# Altium PCB LED.PcbDoc
Units mm, origin at the board's own origin, x right, y up, seen from the top; angles counter-clockwise.
Board outline 20 x 20 mm, 2 copper layers (Top Layer, Bottom Layer), stack 1.671 mm thick; 3 components, 3 nets, 6 pads, 1 vias.
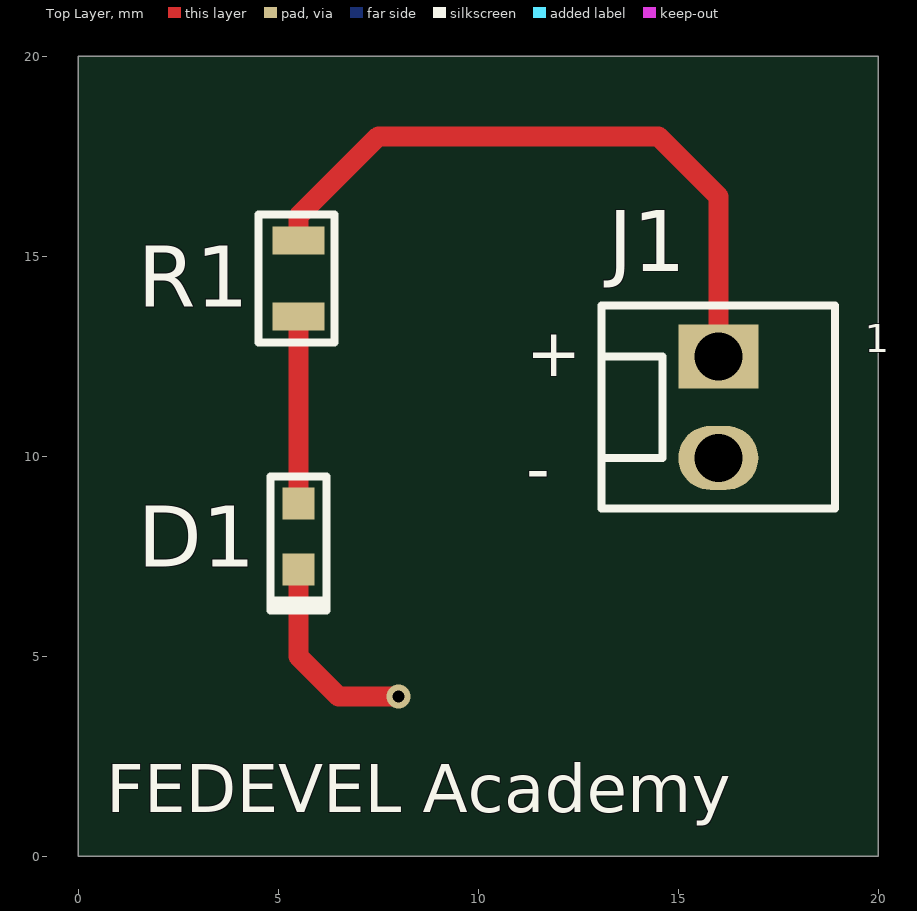
[diagram p0: Top Layer view]
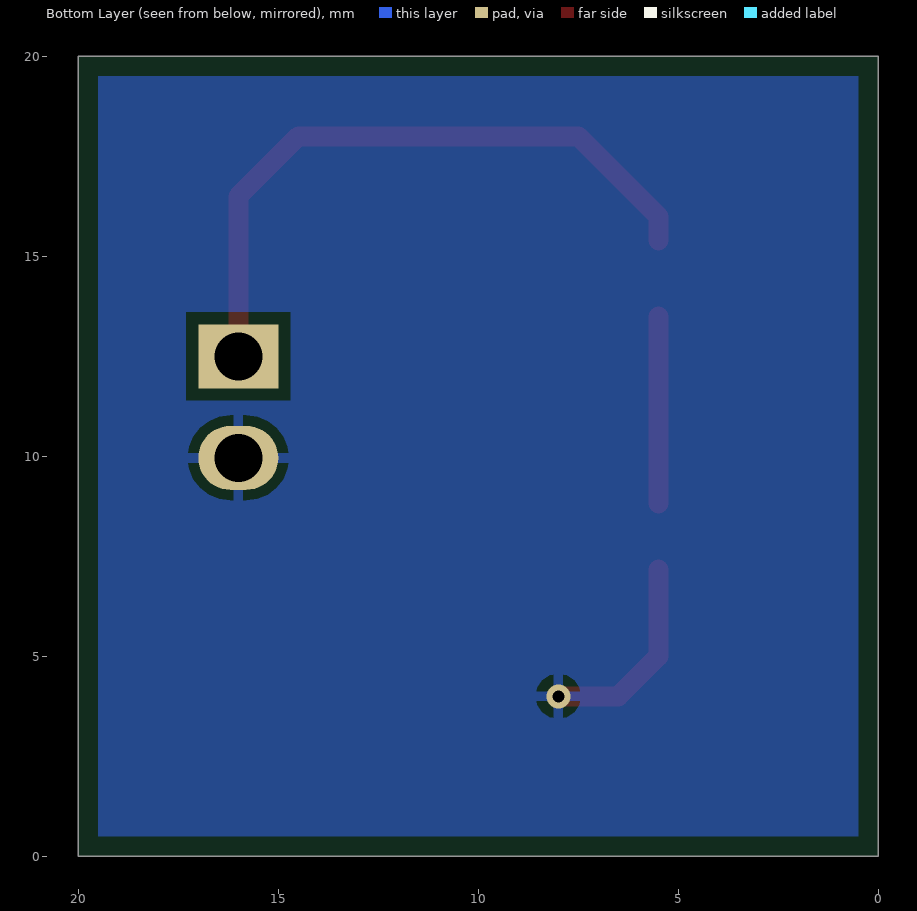
[diagram p1: Bottom Layer view, seen from below]
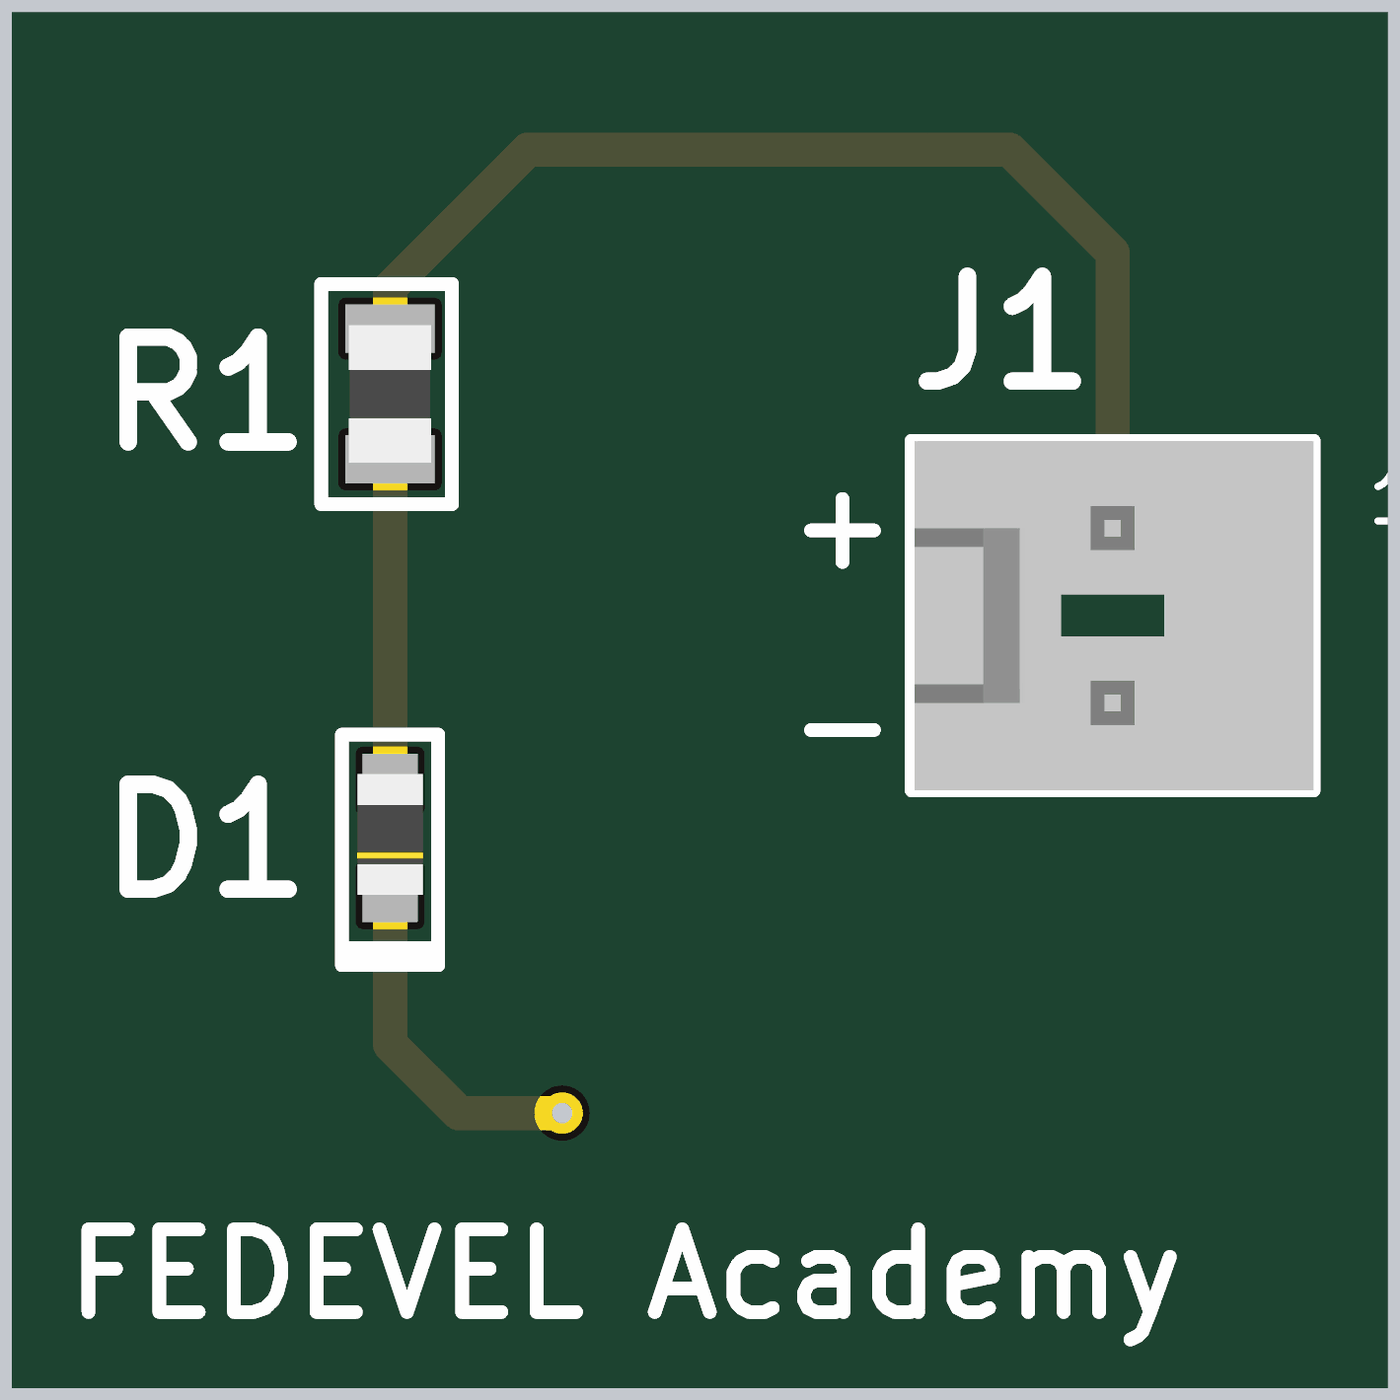
[diagram p2: 3D render of the assembled board from above, using the file's embedded part models]

## Layer stack, top to bottom
Top Solder: solder mask 0.0102, Solder Resist, Dk 3.5
Top Layer: signal copper 0.0356
Dielectric 1: dielectric 1.6, FR-4, Dk 4.8
Bottom Layer: signal copper 0.0356
Bottom Solder: solder mask 0.0102, Solder Resist, Dk 3.5

## Board outline
0,20 20,20 20,0 0,0

## Design rules (kind name [scope] priority, off if disabled: settings)
Clearance [All] p1: gap=0.3 ignorepadtopadclearanceinfootprint=FALSE
PolygonConnect [All] p1: connectstyle=Relief reliefconductorwidth=0.254 reliefentries=4 polygonreliefangle="90 Angle" airgapwidth=0.254
RoutingVias [All] p1: holewidth=0.3 width=0.6 viastyle="Through Hole" minholewidth=0.3 minwidth=0.6 maxholewidth=0.3 maxwidth=0.6
SilkToSolderMaskClearance [IsPad] p1: minsilkscreentomaskgap=0.1 clearancetoexposedcopper=TRUE
SolderMaskExpansion [All] p1: expansion=0.102 istentingtop=FALSE
Width [All] p1: maxlimit=1 minlimit=0.3 preferedwidth=0.5
29 further rules are at their usual default settings.

## Components (designator, comment, footprint, x,y, rotation, side; value= is the part's Value field where it differs from the comment)
D1 "AMBER" LED0603AMBER 5.5,8 r90 top
J1 "1x2 Header" HEADER1x2 16,12.5 r0 top
R1 "360R" R0805 5.5,14.45 r90 top

## Footprints (in the part's own frame and the unit in brackets; to place one, negate y for a bottom-side part, rotate by r counter-clockwise, add the part's x,y. Pads: shape width x height; smd on the part's side, far side on the other; paste and mask are expansions set on the pad)
HEADER1x2 [mm]
  rect 2x1.6 / inner rect 2x1.2 / far side rect 2x1.6 hole 1.2: 1(0,0)
  oval 2x1.6 / inner oval 2x1.2 / far side oval 2x1.6 hole 1.2: 2(0,-2.54)
  silkscreen extent -2.92,-3.81 2.92,1.27, body extent -2.88,-3.81 2.92,1.27, height 11.71
LED0603AMBER [mm]
  rect 0.8x0.8 smd: 1(-0.825,0) 2(0.825,0)
  silkscreen extent -1.85,-0.7 1.5,0.7, body extent -0.82,-0.48 0.92,0.48, height 0.42
R0805 [mm]
  rect 0.7x1.3 smd: 1(-0.95,0) 2(0.95,0)
  silkscreen extent -1.6,-0.9 1.6,1, body extent -1,-0.6 1,0.6, height 0.71

## Part data
D1: library part LNJ437W84RA, "PANASONIC - LNJ437W84RA - LED, AMBER, 0.8MM X 1.1MM, 25MCD, 590NM", Case Code (Imperial)=0603, Case Code (Metric)=1608, Color=Orange, Forward Current=5mA, Forward Voltage=1.95V, Manufacturer="Panasonic SSG", Max Operating Temperature=85°C, Max Power Dissipation=55mW, Min Operating Temperature=-30°C, Package Quantity=5000, Reverse Voltage=4V, Supplier Part Number 1=LNJ437W84RACT-ND, Case/Package=0603, Category=Optoeletronics, ComponentLink1Description=https://datasheet.ciiva.com/4689/lnj437w84ra-aek-226228-4689972.pdf?src-supplier=Mouser, ComponentLink1URL=https://datasheet.ciiva.com/4689/lnj437w84ra-aek-226228-4689972.pdf?src-supplier=Mouser, ComponentLink2Description=https://datasheet.ciiva.com/8028/lnj437w84ra-aek-8028645.pdf?src-supplier=Element14, ComponentLink2URL=https://datasheet.ciiva.com/8028/lnj437w84ra-aek-8028645.pdf?src-supplier=Element14, ComponentLink3Description=https://datasheet.ciiva.com/11775/0900766b80f0a8c0-11775375.pdf?src-supplier=RSComponents, ComponentLink3URL=https://datasheet.ciiva.com/11775/0900766b80f0a8c0-11775375.pdf?src-supplier=RSComponents, Dominant Wavelength=590nm, Height=0.2mm, Illumination Color=Orange, Lead Free="Lead Free", Length=1.6mm, Lens Style=Rectangular, Luminous Intensity=25mcd, Manufacturer Part Number=LNJ437W84RA, Mount="Surface Mount", Number of LEDs=1, Number of Pins=2, Packaging="Tape and Reel", Pricing 1="1=0,31000, 10=0,20200, 100=0,14490, 500=0,12154, 1000=0,11417 (USD)", REACH SVHC="No SVHC", RoHS=Yes, Stock 1=118867, Supplier 1=Digi-Key, Test Current=5mA, Wavelength=590nm, Width=0.8mm
J1: library part 22-29-2021, "Conn Wire to Board HDR 2 POS 2.54mm Solder ST Thru-Hole Bag", Color=White, Flammability Rating="UL94 V-0", Insulation Color=Natural, Manufacturer=Molex, Max Operating Temperature=80°C, Supplier Part Number 1=WM2744-ND, Voltage Rating (DC)=250V, Category=Connectors, ComponentLink1Description=https://datasheet.ciiva.com/70131/022292021-sd-70131706.pdf?src-supplier=Digi-Key, ComponentLink1URL=https://datasheet.ciiva.com/70131/022292021-sd-70131706.pdf?src-supplier=Digi-Key, Connector Type="Header,Male Pin", Contact Material=Brass, Contact Mating Length=0.295inch, Contact Plating=Gold, Contact Post Length=0.14inch, Contact Shape=Square, Fastening Type=Friction, Gender=Male, Glow Wire Compliant=Non-compliant, Halogen Free="Low Halogen", Insulation Height=0.461inch, Insulation Material=Nylon, Lead Free="Lead Free", Manufacturer Part Number=22-29-2021, Mount="Through Hole", Number of Positions=2, Number of Rows=1, Packaging=Bag, Pricing 1="1=0,48000, 10=0,45200, 100=0,31630, 500=0,27112, 1000=0,22593, 5000=0,19365, 10000=0,18074 (USD)", RoHS=Yes, Stock 1=6750, Supplier 1=Digi-Key, Termination=Solder
R1: library part CRCW080536R0FKEA, "RES, THICK FILM, 36R, 1%, 0.125W, 0805; Product Range:AEC-Q200 CRCW Series; Resistance:36ohm; Power Rating:125mW; Resistance Tolerance: 1%; Voltage Rating:150V; Resistor Case Style:0805 [2012 Metric]; Packaging:Cut Tape ;RoHS Compliant: Yes", Case Code (Imperial)=0805, Case Code (Metric)=2012, Manufacturer=Vishay, Max Operating Temperature=155°C, Max Power Dissipation=125mW, Min Operating Temperature=-55°C, Package Quantity=5000, Resistance=36R, Supplier Part Number 1=541-36.0CCT-ND, Temperature Coefficient=100ppm/°C, Tolerance=1%, Voltage Rating=150V, Case/Package=0805, Category=Resistors, ComponentLink1Description=https://datasheet.ciiva.com/5936/1697337-5936166.pdf?src-supplier=Farnell, ComponentLink1URL=https://datasheet.ciiva.com/5936/1697337-5936166.pdf?src-supplier=Farnell, ComponentLink2Description=https://datasheet.ciiva.com/2467/dcrcwe3-2467497.pdf?src-supplier=Digi-Key, ComponentLink2URL=https://datasheet.ciiva.com/2467/dcrcwe3-2467497.pdf?src-supplier=Digi-Key, ComponentLink3Description=https://datasheet.ciiva.com/22674/1912744-22674873.pdf?src-supplier=Element14, ComponentLink3URL=https://datasheet.ciiva.com/22674/1912744-22674873.pdf?src-supplier=Element14, ComponentLink4Description=https://datasheet.ciiva.com/2467/dcrcwe3-2467498.pdf?src-supplier=Digi-Key, ComponentLink4URL=https://datasheet.ciiva.com/2467/dcrcwe3-2467498.pdf?src-supplier=Digi-Key, ComponentLink5Description=https://datasheet.ciiva.com/22705/1697337-22705578.pdf?src-supplier=Element14, ComponentLink5URL=https://datasheet.ciiva.com/22705/1697337-22705578.pdf?src-supplier=Element14, ComponentLink6Description=https://datasheet.ciiva.com/2467/dcrcwe3-2467499.pdf?src-supplier=Digi-Key, ComponentLink6URL=https://datasheet.ciiva.com/2467/dcrcwe3-2467499.pdf?src-supplier=Digi-Key, ComponentLink7Description=https://datasheet.ciiva.com/9013/dcrcwe3-9013853.pdf?src-supplier=Avnet, ComponentLink7URL=https://datasheet.ciiva.com/9013/dcrcwe3-9013853.pdf?src-supplier=Avnet, ComponentLink8Description=https://datasheet.ciiva.com/5550/dcrcwe3-109170-5550495.pdf?src-supplier=Mouser, ComponentLink8URL=https://datasheet.ciiva.com/5550/dcrcwe3-109170-5550495.pdf?src-supplier=Mouser, ComponentLink9Description=https://datasheet.ciiva.com/26316/fld-crcw-e3-data-en-26316527.pdf?src-supplier=Distrelec, ComponentLink9URL=https://datasheet.ciiva.com/26316/fld-crcw-e3-data-en-26316527.pdf?src-supplier=Distrelec, Composition="Thick Film", Contact Plating=Tin, Depth=1.25mm, Features="Automotive AEC-Q200", Height=0.02inch, Lead Free="Lead Free", Length=2mm, Manufacturer Part Number=CRCW080536R0FKEA, Military Standard=Not, Number of Pins=2, Number of Terminations=2, Packaging="Tape and Reel", Power Rating=125mW, Pricing 1="1=0,10000, 10=0,06200, 100=0,02540, 1000=0,01142, 2500=0,00991 (USD)", REACH SVHC=Unknown, RoHS=Yes, Stock 1=14507, Supplier 1=Digi-Key, Termination=SMD/SMT, Voltage Rating (DC)=150V, Weight=0.000194oz, Width=0.049inch

## Via types
v1: diameter 0.6, hole 0.3, Top Layer to Bottom Layer, 1 vias

## Nets (pads, with @x,y where several pads share a name; then routed paths per layer and width w, separated by ;. In a path a pad name is that pad's centre, name@x,y a point inside that pad or via, vN(x,y) a via of type N, cw(c..) or ccw(c..) an arc to the next point about the centre after c; other vN are vias at no path point)
+3V3: J1.1 R1.2 | length 16.5
  Top Layer w0.5: R1.2 5.5,16 7.5,18 14.5,18 16,16.5 J1.1
DIODE: D1.2 R1.1 | length 4.7
  Top Layer w0.5: D1.2 R1.1
GND: D1.1 J1.2 | length 5.1
  Top Layer w0.5: D1.1 5.5,5 6.5,4 v1(8,4)

## Polygon pours and split planes (outlines as drawn)
GND on Bottom Layer "GND_L02_P000" (solid, pour order 0): 0.5,0.5 19.5,0.5 19.5,19.5 0.5,19.5

## Silkscreen, mask and mechanical layers (free items; w line width, h text height)
Top Overlay:
  text "+" at 11.2,12 h1.2
  text "-" at 11.2,9.1 h1.2
  text "FEDEVEL Academy" at 0.7,1.1 h1.2
Board Outline Layer:
  the board outline again, w0.1

## Text inside footprints (layer, text, board x,y; h text height)
J1: Top Overlay "1" at 19.656,12.6 h0.7